# Altium PCB Led.PcbDoc
Units mm, origin at the board's own origin, x right, y up, seen from the top; angles counter-clockwise.
Board outline 8 x 5.71 mm, 2 copper layers (Top Layer, Bottom Layer); 4 components, 8 nets, 35 pads, 8 vias.
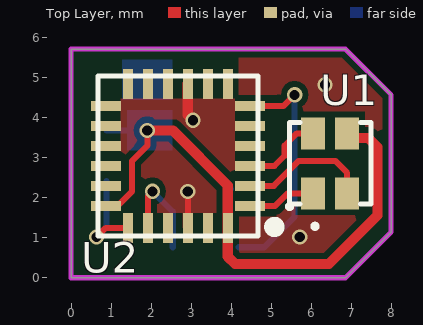
[diagram p0: Top Layer view]
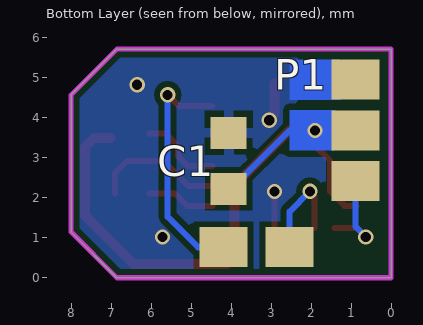
[diagram p1: Bottom Layer view, seen from below]

## Layer stack, top to bottom
Top Solder: solder mask 0.0102, Solder Resist, Dk 3.5
Top Layer: signal copper 0.0356
Dielectric1: dielectric 0.32, FR-4, Dk 4.8
Bottom Layer: signal copper 0.0356
Bottom Solder: solder mask 0.0102, Solder Resist, Dk 3.5

## Board outline
0,0 0,5.715 6.858,5.715 8.001,4.572 8.001,1.143 6.858,0

## Design rules (kind name [scope] priority, off if disabled: settings)
Clearance Clearance_1 [All] p1: gap=0.152 ignorepadtopadclearanceinfootprint=FALSE except(0: Arc-Hole Track-Hole SMDPad-Hole THPad-Hole Via-Hole Fill-Hole Poly-Hole Region-Hole Text-Hole)
Clearance [InPolygon] p2: gap=0.152 ignorepadtopadclearanceinfootprint=FALSE except(0: Arc-Hole Track-Hole SMDPad-Hole THPad-Hole Via-Hole Fill-Hole Poly-Hole Region-Hole Text-Hole)
ComponentClearance [All] p1: gap=0 collisioncheckmode=3 verticalgap=0 showdistances=FALSE
MinimumSolderMaskSliver [All] p1: minsoldermaskwidth=0
PlaneClearance [All] p1: clearance=0.254
PolygonConnect [All vs IsVia] p1: connectstyle=Direct reliefconductorwidth=0.254 reliefentries=4 polygonreliefangle="90 Angle" airgapwidth=0.254
PolygonConnect PolygonConnect_1 [All] p2: connectstyle=Relief reliefconductorwidth=0.254 reliefentries=4 polygonreliefangle="90 Angle" airgapwidth=0.254
RoutingVias [All] p1: holewidth=0.711 width=1.27 viastyle="Through Hole" minholewidth=0.127 minwidth=0.127 maxholewidth=0.711 maxwidth=1.27
SilkToSilkClearance [All] p1: silktosilkclearance=0
SilkToSolderMaskClearance SilkscreenOverComponentPads [IsPad] p1: minsilkscreentomaskgap=-0.025 clearancetoexposedcopper=TRUE
SolderMaskExpansion [All] p1: expansion=0.1
Width [All] p1: maxlimit=1 minlimit=0.152 preferedwidth=0.152
25 further rules are at their usual default settings.

## Components (designator, comment, footprint, x,y, rotation, side; value= is the part's Value field where it differs from the comment)
C1 "Cap Semi" 1608[0603] 4.064,2.921 r270 bottom
P1 "Header 5" Pad_5 0.889,3.048 r180 bottom locked
U1 "0603 LED" LED 6.477,2.86 r90 top
U2 "AW9523" AW9523 2.667,3.048 r180 top locked

## Footprints (in the part's own frame and the unit in brackets; to place one, negate y for a bottom-side part, rotate by r counter-clockwise, add the part's x,y. Pads: shape width x height; smd on the part's side, far side on the other; paste and mask are expansions set on the pad)
1608[0603] [mm] "Chip Capacitor, Body 1.6x0.8mm, IPC High Density"
  rect 0.8x0.9 smd: 1(-0.7,0) 2(0.7,0)
  body extent -0.87,-0.48 0.87,0.48, height 1.3
AW9523 [mm]
  rect 0.75x0.25 smd: 1(-1.8,1.25) 2(-1.8,0.75) 3(-1.8,0.25) 4(-1.8,-0.25) 5(-1.8,-0.75) 6(-1.8,-1.25) 13(1.8,-1.25) 14(1.8,-0.75) 15(1.8,-0.25) 16(1.8,0.25) 17(1.8,0.75) 18(1.8,1.25)
  rect 0.25x0.75 smd: 7(-1.25,-1.8) 8(-0.75,-1.8) 9(-0.25,-1.8) 10(0.25,-1.8) 11(0.75,-1.8) 12(1.25,-1.8) 19(1.25,1.8) 20(0.75,1.8) 21(0.25,1.8) 22(-0.25,1.8) 23(-0.75,1.8) 24(-1.25,1.8)
  silkscreen extent -2.84,-2 2,2
LED [mm]
  rect 0.8x0.6 smd: 1(-0.75,0.425) 2(0.75,0.425) 3(-0.75,-0.425) 4(0.75,-0.425)
  silkscreen extent -1.63,-1.02 1.02,1.02
Pad_5 [mm]
  rect 1.2x1 smd: 1(0,1.905) 2(0,0.635) 3(0,-0.635) 4(-1.651,-2.286) 5(-3.302,-2.286)

## Part data
C1: "Capacitor (Semiconductor SIM Model)"
P1: "Header, 5-Pin"
U1: library part "Header 2X2", "Header, 2-Pin, Dual row"
U2: library part "Header 12X2A", "Header, 12-Pin, Dual row"

## Via types
v1: diameter 0.381, hole 0.254, Top Layer to Bottom Layer, 8 vias

## Nets (pads, with @x,y where several pads share a name; then routed paths per layer and width w, separated by ;. In a path a pad name is that pad's centre, name@x,y a point inside that pad or via, vN(x,y) a via of type N, cw(c..) or ccw(c..) an arc to the next point about the centre after c; other vN are vias at no path point)
BLE: U1.1 U2.1 | length 1.7
  Top Layer w0.152: U2.1 5.1,1.798 5.412,2.11 U1.1
GND: C1.1 P1.1 U2.9 U2.22 | length 1.9
  Top Layer w0.152: U2.22 v1(2.917,2.155) v1@2.921,2.159
  Top Layer w0.254: U2.9 2.917,4.068 v1(3.048,3.937)
  other v1: 5.715,1.016 6.35,4.826
GRE: U1.2 U2.3 | length 2.1
  Top Layer w0.152: U2.3 5.084,2.798 5.334,3.048 5.334,3.302 5.642,3.61 U1.2
MOTO: P1.5 U2.6 | length 6
  Top Layer w0.152: U2.6 5.314,4.298 v1(5.588,4.572)
  Bottom Layer w0.152: P1.5 4.826,0.762 5.588,1.524 v1(5.588,4.572)
RED: U1.3 U2.2 | length 3.3
  Top Layer w0.152: U2.2 5.068,2.298 5.691,2.921 6.604,2.921 6.902,2.623 U1.3
SCL: P1.3 U2.19 | length 2.4
  Top Layer w0.152: v1(0.635,1.016) 0.867,1.248 U2.19
  Bottom Layer w0.152: v1(0.635,1.016) 0.889,1.27 P1.3
SDA: P1.4 U2.20 | length 2.6
  Top Layer w0.152: U2.20 1.917,2.044 v1(2.032,2.159)
  Bottom Layer w0.152: v1(2.032,2.159) 2.54,1.651 P1.4
VCC: C1.2 P1.2 U1.4 U2.18 U2.24 | length 17.3
  Top Layer w0.152: U2.18 1.163,1.798 1.524,2.159 1.524,2.921 1.905,3.302 v1(1.905,3.683)
  Top Layer w0.254: v1(1.905,3.683) 2.54,3.683 3.917,2.306 U2.24 3.917,0.528 4.102,0.343 6.439,0.343 7.658,1.562 7.658,3.264 7.429,3.492 U1.4@7.02,3.492
  Bottom Layer w0.152: P1.2 v1(1.905,3.683) 2.54,3.683 C1.2@4.002,2.221
pads on no net: U2.4 U2.5 U2.7 U2.8 U2.10 U2.11 U2.12 U2.13 U2.14 U2.15 U2.16 U2.17 U2.21 U2.23

## Polygon pours and split planes (outlines as drawn)
GND on Top Layer "Top Layer-No Net" (solid, remove dead copper, pour order 2): -0.075,5.668 8.18,5.668 8.18,-0.047 -0.075,-0.047
GND on Bottom Layer "BottomLayer-No Net" (solid, remove dead copper, pour order 4): 0,5.715 8.255,5.715 8.255,0 0,0

## Keep-outs
Keep-Out Layer:
  the board outline again, w0.127

## Other copper
Bottom Layer:
  rectangle net VCC: 1.397,3.175 2.54,4.191
  rectangle net GND: 1.27,4.445 2.54,5.461

## Silkscreen, mask and mechanical layers (free items; w line width, h text height)
Top Overlay:
  circle w0.254: c5.08,1.27 r0.127
Mechanical 1:
  the board outline again, w0.127